# Altium PCB BLE_tag_NRF.PcbDoc
Units mm, origin at the board's own origin, x right, y up, seen from the top; angles counter-clockwise.
Board outline 48 x 58 mm, 2 copper layers (Top Layer, Bottom Layer); 34 components, 24 nets, 113 pads, 161 vias.
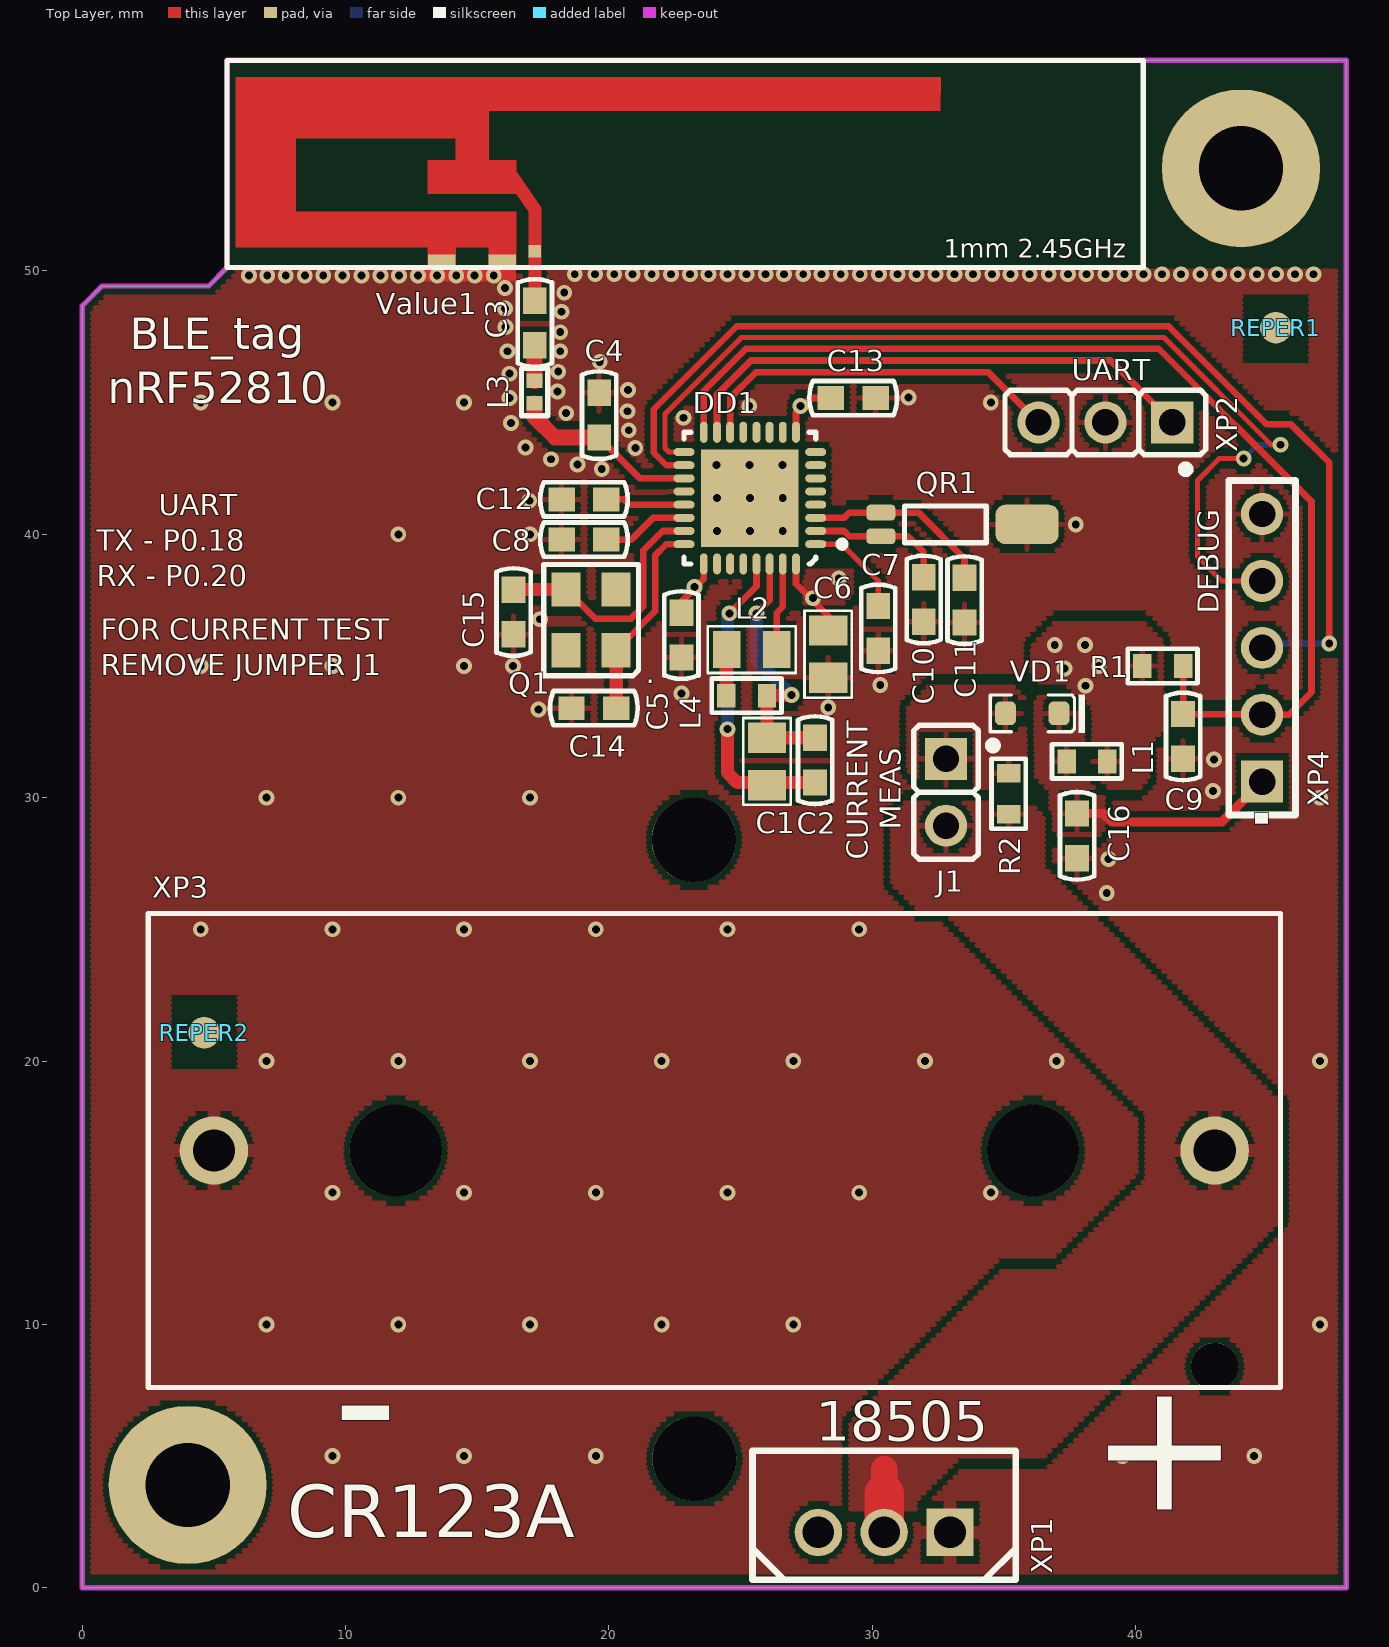
[diagram p0: Top Layer view]
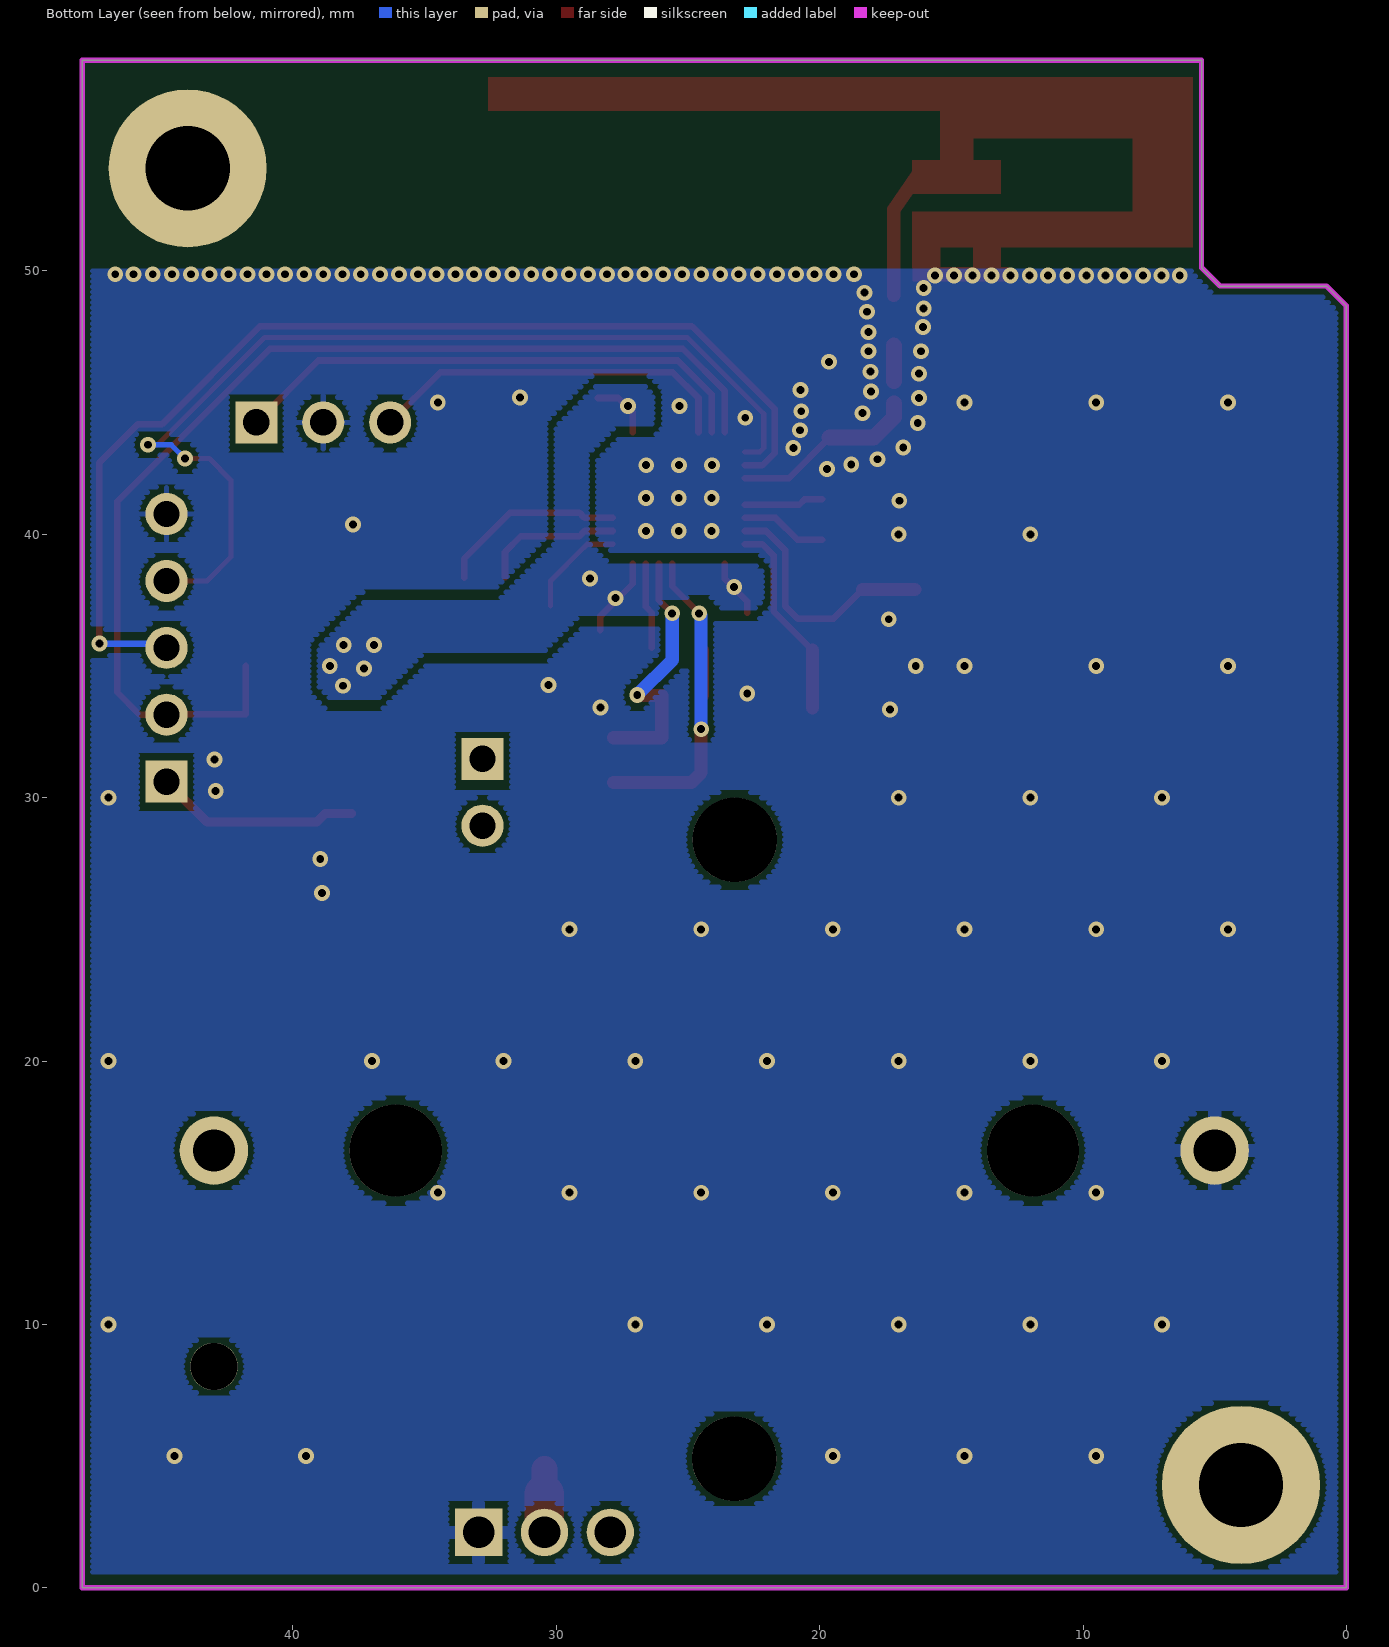
[diagram p1: Bottom Layer view, seen from below]
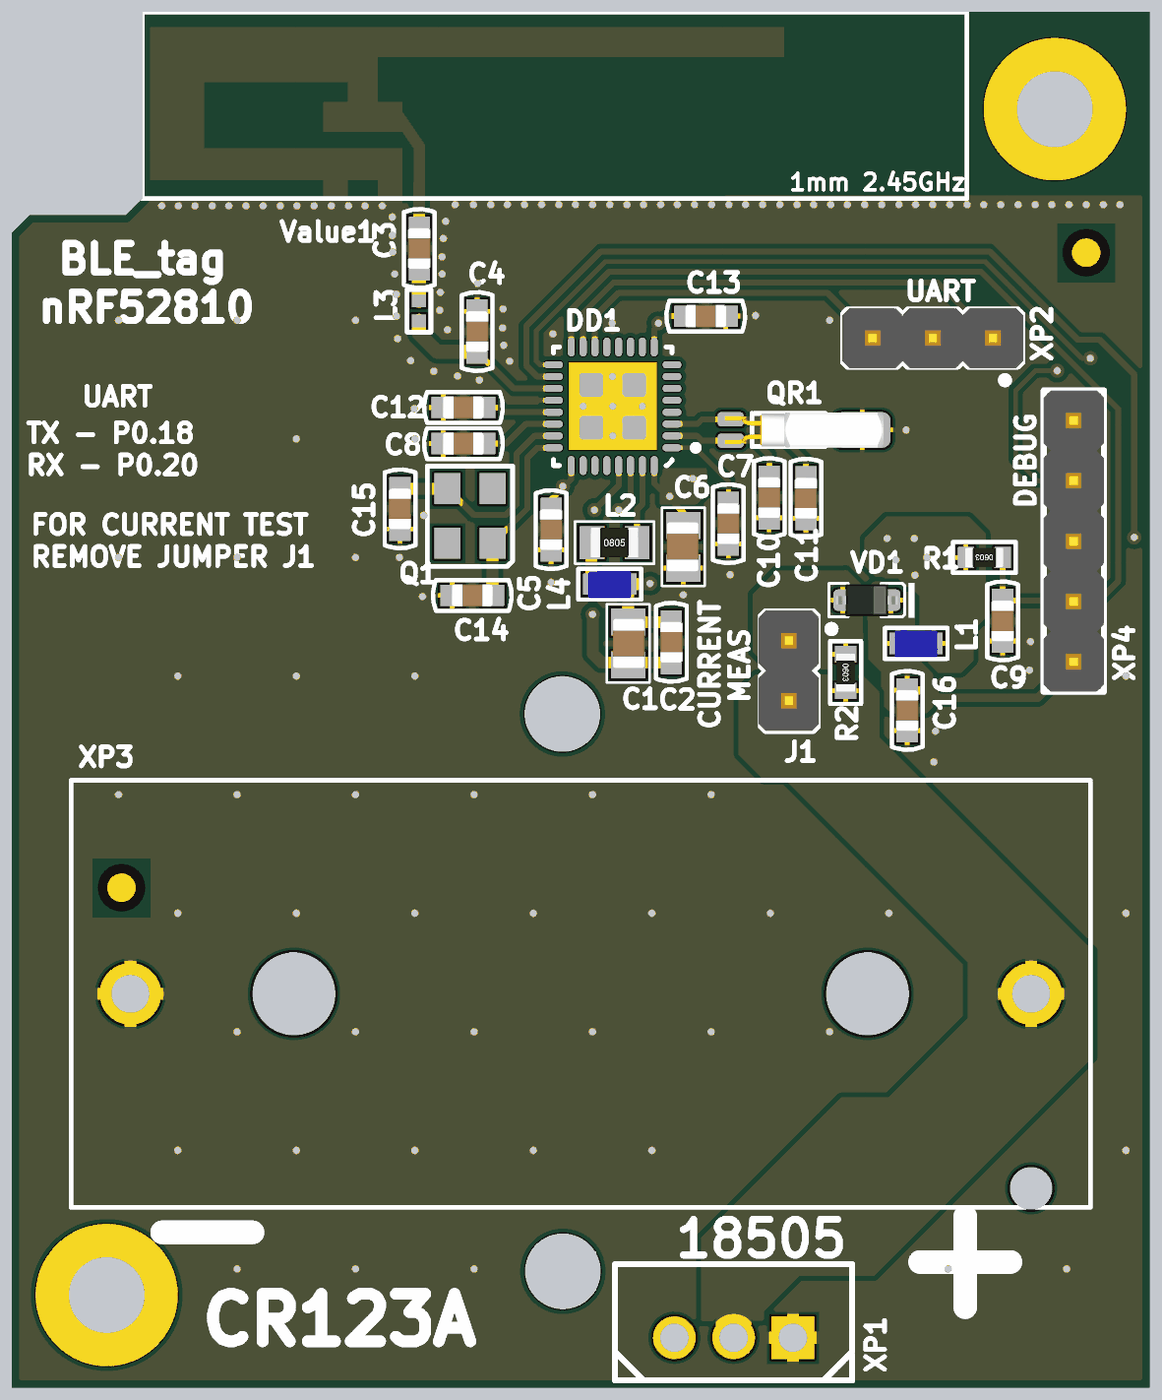
[diagram p2: 3D render of the assembled board from above, using the file's embedded part models]

## Layer stack, top to bottom
Top Solder: solder mask 0.0102, Solder Resist, Dk 3.5
Top Layer: signal copper 0.0356
Dielectric 1: dielectric 0.32, FR-4, Dk 4.8
Bottom Layer: signal copper 0.0356
Bottom Solder: solder mask 0.0102, Solder Resist, Dk 3.5

## Board outline
0,0 0,48.675 0.75,49.425 4.8,49.425 5.5,50.125 5.5,58 48,58 48,0

## Design rules (kind name [scope] priority, off if disabled: settings)
Clearance [All] p1: gap=0.2 ignorepadtopadclearanceinfootprint=FALSE
ComponentClearance [All] p1: gap=0.05 collisioncheckmode=3 verticalgap=2540 showdistances=FALSE
HoleSize [All] p1: absolutevalues=TRUE maxlimit=10 minlimit=0.025 maxpercent=80.000 minpercent=20.000
HoleToHoleClearance [All] p1: gap=0.05 allowstackedmicrovias=TRUE
MinimumSolderMaskSliver [All] p1: minsoldermaskwidth=0.05
PolygonConnect PolygonConnect_1 [InComponent('XP3') OR InComponent('XP1')] p1: connectstyle=Relief reliefconductorwidth=0.5 reliefentries=4 polygonreliefangle="90 Angle" airgapwidth=0.2
PolygonConnect VIA [IsVia] p2: connectstyle=Direct reliefconductorwidth=0.254 reliefentries=4 polygonreliefangle="90 Angle" airgapwidth=0.254
PolygonConnect [All] p3: connectstyle=Relief reliefconductorwidth=0.2 reliefentries=4 polygonreliefangle="90 Angle" airgapwidth=0.2
RoutingVias [All] p1: holewidth=0.4 width=0.8 viastyle="Through Hole" minholewidth=0.3 minwidth=0.6 maxholewidth=0.5 maxwidth=1
ShortCircuit Antenna [InComponent('ANT1')] p1: allowed=TRUE
ShortCircuit [All] p2: allowed=FALSE
SilkToSilkClearance [All] p1: silktosilkclearance=0.05
SilkToSolderMaskClearance [IsPad] p1: minsilkscreentomaskgap=0.05 clearancetoexposedcopper=TRUE
SolderMaskExpansion [All] p1: expansion=0.102
Width [All] p1: maxlimit=3 minlimit=0.2 preferedwidth=0.5
23 further rules are at their usual default settings.

## Classes and differential pairs
component class [4]-CONNECTORS: C16 J1 R2 VD1 XP1 XP2 XP3 XP4
component class [3]-MCU: C1 C2 C3 C4 C5 C6 C7 C8 C9 C10 C11 C12 C13 C14 C15 DD1 L1 L2 L3 L4 Q1 QR1 R1 REPER1 REPER2 Value1

## Components (designator, comment, footprint, x,y, rotation, side; value= is the part's Value field where it differs from the comment)
C1 "n.p" CC0805 26,31.375 r270 top
C2 "1uF" CC0603 27.825,31.425 r270 top
C3 "12pF" CC0603 17.186,48.025 r90 top
C4 "0.9pF" CC0603 19.625,44.525 r270 top
C5 "0.1uF" CC0603 22.75,36.175 r270 top
C6 "4.7uF" CC0805 28.325,35.45 r90 top
C7 "0.1uF" CC0603 30.225,36.425 r90 top
C8 "100pF" CC0603 19.05,39.8 r0 top
C9 "200pF" CC0603 41.8,32.325 r90 top
C10 "12pF" CC0603 31.95,37.525 r270 top
C11 "12pF" CC0603 33.5,37.5 r270 top
C12 "n.p" CC0603 19.05,41.325 r0 top
C13 "0.1uF" CC0603 29.275,45.175 r180 top
C14 "12pF" CC0603 19.425,33.4 r180 top
C15 "12pF" CC0603 16.375,37.05 r270 top
C16 "0.1uF" CC0603 37.775,28.55 r90 top
DD1 "nRF52810QCAA" QFN-32 27.85,39.625 r180 top
J1 "PLS-02" PLS-02 32.775,31.475 r270 top
L1 "BLM18HE152SN1" L0603 38.15,31.375 r0 top
L2 "10uH" RC0805 25.425,35.625 r0 top
L3 "3.9nH" L0402 17.175,45.4 r90 top
L4 "L0603" L0603 25.225,33.875 r0 top value=15nH
Q1 "SJK-7U" QUARTZ_3225_4 18.375,35.6 r90 top
QR1 "MS3V-T1R" MS3V-T1R 30.325,40.825 r0 top
R1 "100k" RC0603 41.025,35 r180 top
R2 "n.p" RC0603 35.175,30.15 r270 top
REPER1 "REPER1.2" REPER1.2 45.325,47.85 r90 top
REPER2 "REPER1.2" REPER1.2 4.625,21.075 r90 top
Value1 "ANTENNA_IFA_245_1MM" IFA245_1mm 13.092,44.294 r0 top value="IFA 2.45GHz" (schematic designator =Value1)
VD1 "PMEG1020EJ" SOD323 36.075,33.2 r0 top
XP1 "MW03D" MW03D 32.95,2.1 r180 top
XP2 "PLS03" PLS-03 41.39,44.25 r180 top
XP3 "BHC-CR123A" CR123_HOLDER 43,16.6 r180 top
XP4 "PLS-05" PLS-05 44.8,30.61 r90 top

## Footprints (in the part's own frame and the unit in brackets; to place one, negate y for a bottom-side part, rotate by r counter-clockwise, add the part's x,y. Pads: shape width x height; smd on the part's side, far side on the other; paste and mask are expansions set on the pad)
CC0603 [mm]
  rect 1x0.9 smd paste-25.4: 1(-0.85,0) 2(0.85,0)
  silkscreen extent -1.66,-0.65 1.66,0.65, body extent -0.87,-0.47 0.88,0.48, height 0.85
CC0805 [mm]
  rect 1.15x1.45 smd paste-25.4: 1(-0.9,0) 2(0.9,0)
  silkscreen extent -1.65,-0.9 1.65,0.9, body extent -1.05,-0.65 1.05,0.7, height 1.1
CR123_HOLDER [mm]
  round 1.8 hole 1.8 unplated: 0(0,8.2)
  round 3.5 hole 3.5 unplated: 0(6.9,0) 0(31.1,0)
  round 2.6 hole 1.6: 1(0,0) 2(38,0)
  silkscreen extent -2.5,-9 40.5,9, body extent -2.5,-9 40.5,9, height 14
IFA245_1mm [mm]
  rect 0.48x0.48 smd paste-2: 1(4.094,6.459)
  rect 1.046x0.5 smd paste-2: 2(0.558,6.081) 2(2.86,6.081)
  Top Layer region: 19.497,13.06 19.496,13.061 -7.268,13.061 -7.268,6.606 0.035,6.606 0.035,5.831 1.081,5.831 1.081,6.605 2.337,6.605 2.337,5.831 3.383,5.831 3.383,7.955 3.382,7.956 -4.987,7.956 -4.987,10.748 -4.986,10.749 1.082,10.749 1.081,10.748 1.081,9.912 0.035,9.912 0.035,8.647 3.38,8.647 3.382,8.645 3.854,7.956 3.854,6.22 4.335,6.219 4.335,8.104 3.383,9.502 3.383,9.911 2.338,9.912 2.336,9.912 2.337,11.097 2.337,11.795 19.496,11.796
  silkscreen extent -7.6,5.83 27.2,13.7
L0402 [mm]
  rect 0.55x0.6 smd: 1(-0.425,0) 2(0.425,0)
  silkscreen extent -0.9,-0.5 0.9,0.5
L0603 [mm]
  rect 0.7x0.9 smd paste-25.4: 1(-0.775,0) 2(0.774,0)
  silkscreen extent -1.32,-0.65 1.33,0.65, body extent -0.9,-0.58 0.9,0.54, height 1
MS3V-T1R [mm]
  rrect50% 1.1x0.6 smd: 1(0,0) 2(0,-0.9)
  rrect50% 2.4x1.5 smd: 3(5.55,-0.45)
  silkscreen extent 0.9,-1.15 4,0.25, body extent -0.25,-1.19 6.45,0.29, height 1.48
MW03D [mm]
  rect 1.8x1.8 hole 1.2: 1(0,0)
  round 1.8 hole 1.2: 2(2.5,0) 3(5,0)
  silkscreen extent -2.5,-3.1 7.5,1.8
PLS-02 [mm]
  rect 1.6x1.6 hole 1: 1(0,0.025)
  round 1.6 hole 1: 2(2.54,0.025)
  silkscreen extent -1.27,-1.2 3.81,1.95, body extent -1.29,-1.26 3.79,1.28, height 10.1
PLS-03 [mm]
  rect 1.6x1.6 hole 1: 1(0,0)
  round 1.6 hole 1: 2(2.54,0) 3(5.08,0)
  silkscreen extent -1.27,-1.23 6.35,1.93, body extent -1.27,-1.27 6.35,1.27, height 10.1
PLS-05 [mm]
  rect 1.6x1.6 hole 1: 1(0,0)
  round 1.6 hole 1: 2(2.54,0) 3(5.08,0) 4(7.62,0) 5(10.16,0)
  silkscreen extent -1.27,-1.27 11.43,1.27, body extent -1.27,-1.27 11.43,1.27, height 10.1
QFN-32 [mm]
  oval 0.8x0.3 smd mask+0.05: 1(0,0) 2(0,-0.5) 3(0,-1) 4(0,-1.5) 5(0,-2) 6(0,-2.5) 7(0,-3) 8(0,-3.5) 17(5,-3.5) 18(5,-3) 19(5,-2.5) 20(5,-2) 21(5,-1.5) 22(5,-1) 23(5,-0.5) 24(5,0)
  oval 0.3x0.8 smd mask+0.05: 9(0.75,-4.25) 10(1.25,-4.25) 11(1.75,-4.25) 12(2.25,-4.25) 13(2.75,-4.25) 14(3.25,-4.25) 15(3.75,-4.25) 16(4.25,-4.25) 25(4.25,0.75) 26(3.75,0.75) 27(3.25,0.75) 28(2.75,0.75) 29(2.25,0.75) 30(1.75,0.75) 31(1.25,0.75) 32(0.75,0.75)
  rect 3.7x3.7 smd paste-10 mask+0.05: 33(2.5,-1.75)
  silkscreen extent -1.13,-4.25 5,0.75
QUARTZ_3225_4 [mm]
  rect 1.3x1.1 smd: 1(0,-1.9) 2(2.3,-1.9) 3(2.3,0) 4(0,0)
  silkscreen extent -0.97,-2.75 3.25,0.85
RC0603 [mm]
  rect 0.7x0.9 smd paste-25.4: 1(-0.775,0) 2(0.774,0)
  silkscreen extent -1.32,-0.65 1.33,0.65, body extent -0.8,-0.4 0.8,0.4, height 0.45
RC0805 [mm]
  rect 1.05x1.4 smd paste-25.4: 1(-0.95,0) 2(0.95,0)
  silkscreen extent -1.67,-0.89 1.67,0.89, body extent -1,-0.62 1,0.63, height 0.6
REPER1.2 [mm]
  round 1.2 smd paste-25.4 mask+0.05: 1(0,0)
  Top Layer pour cut-out: -1.35,-1.325 1.325,-1.325 1.325,1.325 -1.35,1.325
SOD323 [mm]
  rrect50% 0.8x0.9 smd: 1(-1.016,0) 2(1.016,0)
  silkscreen extent -1.6,-0.74 2,0.72, body extent -1.3,-0.67 1.3,0.67, height 1.1

## Part data
C1 C6: library part CC0805, "CC0805"
C2 C3 C4 C5 C7 C8 C9 C10 C11 C12 C13 C14 C15 C16: library part CC0603, "CC0603"
DD1: library part NRF52810QCAA, "BLE 5 controller"
L1: library part L0603, "L0603"
L2: library part L0805, "L0805"
L3: library part L0402, "L0402"
Q1: "3.2x2.5mm 4 pin SMD quartz crystal"
QR1: "CRYSTAL_32768 Hz"
R1 R2: library part RC0603, "RC0603"
Value1: "Antenna 2.45GHz"
VD1: library part PMEG2010
XP3: "Holder for CR123 battery"

## Free pads (board coordinates)
  round 6 hole 3.2 unplated mask+0.05: 0(4,3.9) 0(44,53.9)
  round 3.2 hole 3.2 unplated mask+0.05: 0(23.225,28.4) 0(23.246,4.9)

## Via types
v1: diameter 0.6, hole 0.3, Top Layer to Bottom Layer, tented both sides, 161 vias

## Nets (pads, with @x,y where several pads share a name; then routed paths per layer and width w, separated by ;. In a path a pad name is that pad's centre, name@x,y a point inside that pad or via, vN(x,y) a via of type N, cw(c..) or ccw(c..) an arc to the next point about the centre after c; other vN are vias at no path point)
+3V: C16.2 L1.1 VD1.2 XP4.1 | length 7.8
  Top Layer w0.35: C16.2 38.776,29.4 39.101,29.075 43.265,29.075 XP4.1
+3V_F: C5.1 C6.2 C13.2 DD1.9 DD1.25 DD1.32 L1.2 R1.2 | length 7.5
  Top Layer w0.25: C5.1 22.75,37.45 23.6,38.3 DD1.25 ; DD1.32 27.1,38.125 28.325,36.9 C6.2 ; DD1.9 27.1,44.625 27.65,45.175 C13.2
  other v1: 38.1,34.25 37.3,34.9 38.6,35 36.925,35.8 38.075,35.8 27.75,37.575 23.246,38 28.725,38.325 27.275,44.875
GND: C4.1 C5.2 C6.1 C7.1 C8.1 C9.1 C10.2 C11.2 C12.1 C13.1 C14.2 C15.2 C16.1 DD1.20 DD1.33 QR1.3 Value1.2 XP1.1 XP2.2 XP3.2 XP4.5
  other v1: 9.5,5 14.5,5 19.5,5 39.5,5 44.5,5 7,10 12,10 17,10 22,10 27,10 47,10 9.5,15 14.5,15 19.5,15 24.5,15 29.5,15 34.5,15 7,20 12,20 17,20 22,20 27,20 32,20 37,20 47,20 4.5,25 9.5,25 14.5,25 19.5,25 24.5,25 29.5,25 38.9,26.375 38.966,27.675 7,30 12,30 17,30 47,30 42.934,30.25 42.975,31.45 17.325,33.35 28.325,33.425 22.749,33.95 30.3,34.275 4.5,35 9.5,35 14.5,35 16.35,35 17.375,36.775 12,40 17,40 24.1,40.125 25.35,40.125 26.6,40.125 37.725,40.375 16.975,41.275 24.1,41.375 25.35,41.375 26.6,41.375 19.725,42.475 24.088,42.625 25.338,42.625 26.588,42.625 18.8,42.65 17.8,42.85 21,43.275 16.825,43.3 20.75,43.95 16.275,44.225 22.825,44.425 18.374,44.6 20.7,44.675 25.325,44.875 4.5,45 9.5,45 14.5,45 34.5,45 16.225,45.175 31.375,45.2 18.05,45.425 20.725,45.476 16.225,46.1 18.075,46.175 19.65,46.55 16.15,46.95 18.15,46.95 18.15,47.675 16.075,47.875 18.2,48.45 16.05,48.575 18.3,49.175 16.05,49.35 6.325,49.825 7.025,49.825 7.725,49.825 8.45,49.825 9.15,49.825 9.875,49.825 10.6,49.825 11.325,49.825 12.025,49.825 12.75,49.825 13.475,49.825 14.2,49.825 14.9,49.825 15.625,49.825 18.7,49.875 19.475,49.875 20.2,49.875 20.9,49.875 21.625,49.875 22.35,49.875 23.075,49.875 23.775,49.875 24.5,49.875 25.225,49.875 25.95,49.875 26.65,49.875 27.375,49.875 28.075,49.875 28.8,49.875 29.525,49.875 30.25,49.875 30.95,49.875 31.675,49.875 32.4,49.875 33.125,49.875 33.825,49.875 34.55,49.875 35.25,49.875 35.975,49.875 36.7,49.875 37.425,49.875 38.125,49.875 38.85,49.875 39.575,49.875 40.3,49.875 41,49.875 41.725,49.875 42.45,49.875 43.175,49.875 43.875,49.875 44.6,49.875 45.325,49.875 46.05,49.875 46.75,49.875
NetC1_1: C1.1 C2.1 DD1.30 L4.2 | length 10.1
  Top Layer w0.25: v1(25.6,37) 26.1,37.5 DD1.30
  Top Layer w0.5: C1.1 C2.1 ; C1.1@25.999,32.276 L4.2 26.9,33.875 v1(26.925,33.9)
  Bottom Layer w0.5: v1(25.6,37) 25.6,35.225 v1(26.925,33.9)
NetC1_2: C1.2 C2.2 DD1.29 | length 14
  Top Layer w0.25: v1(24.575,37) 25.6,38.025 DD1.29
  Top Layer w0.5: v1(24.5,32.6) 24.5,30.95 24.875,30.575 C2.2
  Bottom Layer w0.25: 24.575,34.875 v1(24.575,37)
  Bottom Layer w0.5: v1(24.5,32.6) 24.5,36.925 v1(24.575,37)
NetC3_1: C3.1 L3.2 | length 1.4
  Top Layer w0.6: L3.2 17.175,47.164 C3.1
NetC3_2: C3.2 Value1.1 | length 1.7
  Top Layer w0.5: C3.2@17.186,49.064 Value1.1
NetC4_2: C4.2 DD1.19 L3.1 | length 7.2
  Top Layer w0.25: C4.2 21.175,42.125 DD1.19
  Top Layer w0.6: L3.1 17.175,44.45 17.95,43.675 C4.2
NetC7_2: C7.2 DD1.1 | length 3.9
  Top Layer w0.2: DD1.1@27.851,39.626 28.823,39.626 28.949,39.5 28.958,39.5 30.225,38.233 C7.2
NetC8_2: C8.2 DD1.22 | length 3.3
  Top Layer w0.25: C8.2 20.85,39.8 21.675,40.625 DD1.22
NetC9_2: C9.2 DD1.16 R1.1 XP4.2 | length 42
  Top Layer w0.25: DD1.16 23.6,45.448 25.202,47.05 40.875,47.05 46.675,41.25 46.675,34 45.825,33.15 XP4.2 44.775,33.175 C9.2 R1.1
NetC10_1: C10.1 DD1.2 QR1.2 | length 5.4
  Top Layer w0.25: DD1.2 28.925,40.125 29.125,39.925 QR1.2 31.35,39.925 31.95,39.325 C10.1
NetC11_1: C11.1 DD1.3 QR1.1 | length 7.2
  Top Layer w0.25: DD1.3 28.925,40.625 29.125,40.825 QR1.1 31.75,40.825 33.5,39.075 C11.1
NetC12_2: C12.2 DD1.21 | length 3
  Top Layer w0.25: C12.2 20.575,41.325 20.775,41.125 DD1.21
NetC14_1: C14.1 DD1.24 Q1.1 | length 7.7
  Top Layer w0.25: Q1.1 21.75,37.075 21.75,39.2 22.175,39.625 DD1.24
  Top Layer w0.5: C14.1 Q1.1
NetC15_1: C15.1 DD1.23 Q1.3 | length 9.6
  Top Layer w0.25: Q1.3 19.475,36.8 20.839,36.8 21.3,37.261 21.3,39.386 22.039,40.125 DD1.23
  Top Layer w0.5: C15.1 Q1.3
NetDD1_14: DD1.14 XP2.3 | length 14.2
  Top Layer w0.25: DD1.14 24.6,45.175 25.575,46.15 34.41,46.15 XP2.3
NetDD1_15: DD1.15 XP2.1 | length 20.2
  Top Layer w0.25: DD1.15 24.1,45.311 25.389,46.6 39.04,46.6 XP2.1
NetDD1_17: DD1.17 XP4.4 | length 37.8
  Top Layer w0.2: DD1.17 22.275,43.125 22.125,43.275 22.125,44.574 25.026,47.475 41.075,47.475 45.15,43.4 v1(45.5,43.4) ; v1(44.1,42.875) 43.175,42.875 42.35,42.05 42.35,39.15 43.27,38.23 XP4.4
  Bottom Layer w0.2: v1(44.1,42.875) 44.625,43.4 v1(45.5,43.4)
NetDD1_18: DD1.18 XP4.3 | length 41.6
  Top Layer w0.25: DD1.18 22.174,42.625 21.7,43.099 21.7,44.75 24.85,47.9 41.251,47.9 44.976,44.175 45.9,44.175 47.35,42.725 v1(47.35,35.85)
  Bottom Layer w0.25: XP4.3 44.96,35.85 v1(47.35,35.85)
NetDD1_31: DD1.31 L2.2 | length 3.3
  Top Layer w0.25: L2.2@26.375,35.7 26.375,37.025 26.6,37.25 DD1.31
NetJ1_1: J1.1 R2.1 VD1.1
NetJ1_2: J1.2 R2.2 XP1.2 XP3.1 | length 2.4
  Top Layer w1: 30.45,3.575 30.45,4.5
  Top Layer w1.5: XP1.2 30.45,3.575
NetL2_1: L2.1 L4.1 | length 1.8
  Top Layer w0.5: L4.1 24.45,35.6 L2.1
pads on no net: DD1.4 DD1.5 DD1.6 DD1.7 DD1.8 DD1.10 DD1.11 DD1.12 DD1.13 DD1.26 DD1.27 DD1.28 Q1.2 Q1.4 REPER1.1 REPER2.1 XP1.3 XP3.0

## Polygon pours and split planes (outlines as drawn)
GND on Top Layer "GND_L01_P028" (hatched Horizontal grid 0.2 track 0.2, remove dead copper, pour order 28): 0,58 48,58 48,0 0,0
+3V_F on Top Layer "+3V_F_L01_P018" (hatched Horizontal grid 0.2 track 0.2, remove dead copper, pour order 18): 29.225,38.675 27.425,38.675 27.425,37.325 28.825,37.325 29.225,37.725
+3V_F on Top Layer "+3V_F_L01_P024" (hatched Horizontal grid 0.2 track 0.2, remove dead copper, pour order 24): 38.225,33.425 37.425,34.225 36.525,34.225 36.075,34.675 36.075,35.775 36.925,36.625 40.325,36.625 41,35.95 41,32.525 40.475,32 40.475,30.7 40,30.225 38.875,30.225 38.225,30.875
+3V on Top Layer "+3V_L01_P021" (hatched Horizontal grid 0.2 track 0.2, remove dead copper, pour order 21): 36.2,32.4 36.2,33.687 36.4,33.887 37.363,33.887 38,33.25 38,30.8 38.776,30.024 38.776,28.751 38.55,28.525 37.125,28.525 36.775,28.875 36.775,30.225 36.225,30.775 36.225,31.35
NetJ1_1 on Top Layer "NETJ1_1_L01_P022" (hatched Horizontal grid 0.2 track 0.2, remove dead copper, pour order 22): 36.1,33.45 35.175,34.375 35.15,34.35 32.275,34.35 31.35,33.425 31.35,31.05 32.1,30.3 35.975,30.3 36.1,30.425
NetJ1_2 on Top Layer "NETJ1_2_L01_P020" (hatched Horizontal grid 0.2 track 0.2, remove dead copper, pour order 20): 29.175,2.887 29.175,6.275 35.05,12.15 37.025,12.15 40.425,15.55 40.425,17.95 32.65,25.725 31.75,25.725 30.75,26.725 30.75,29.3 31.425,29.975 35.8,29.975 36.5,29.275 36.5,27.4 45.5,18.4 45.5,13.95 36.35,4.8 33.175,4.8 31.625,3.25 31.625,2.912
GND on Bottom Layer "GND_L02_P026" (hatched Horizontal grid 0.2 track 0.2, remove dead copper, pour order 26): 0,58 48,58 48,0 0,0
+3V_F on Bottom Layer "+3V_F_L02_P019" (hatched Horizontal grid 0.2 track 0.2, remove dead copper, pour order 19): 28,38.9 28.825,39.725 28.825,43 27.8,44.025 26.55,44.025 26.325,44.25 26.325,45.3 26.675,45.65 28.45,45.65 30,44.1 30,39.7 32.3,37.4 37.325,37.4 39,35.725 39,34.175 38.55,33.725 36.8,33.725 35.05,35.475 30.55,35.475 29.175,36.85 25.8,36.85 25,37.65 24.175,37.65 23.6,37.075 22.575,37.075 22.175,37.475 22.175,38.575 22.5,38.9

## Keep-outs
Keep-Out Layer:
  the board outline again, w0.2

## Other copper
Top Layer:
  rectangle net GND: 12.821,49.6 16.475,50.15
  pour cut-out: 5.5,50.125 5.5,58 48,58 48,50.175
  pour cut-out: 14.173,50.899 15.429,50.899 15.429,50.125 14.173,50.125
  pour cut-out: 5.5,50.9 5.5,50.125 13.127,50.125 13.127,50.9
Bottom Layer:
  pour cut-out: 5.5,50.125 5.5,58 48,58 48,50.175

## Silkscreen, mask and mechanical layers (free items; w line width, h text height)
Top Overlay:
  text "BLE_tag" at 1.8,47.025 h1.2
  text "UART" at 37.58,45.85 h0.8
  text "nRF52810" at 0.975,44.975 h1.2
  text "UART" at 2.9,40.725 h0.8
  text "TX - P0.18" at 0.55,39.375 h0.8
  text "RX - P0.20" at 0.55,38.025 h0.8
  text "DEBUG" at 43.15,36.975 h0.8 r90
  text "FOR CURRENT TEST" at 0.7,36 h0.8
  text "REMOVE JUMPER J1" at 0.7,34.65 h0.8
  text "." at 21.4,34.35 h0.8
  text "MEAS" at 31.075,28.775 h0.8 r90
  text "." at 46,28.575 h5 r90
  text "CURRENT" at 29.825,27.65 h0.8 r90
  text "18505" at 27.85,5.575 h1.5
  text "CR123A" at 7.775,1.925 h2

## Text inside footprints (layer, text, board x,y; h text height)
Value1: Top Overlay "1mm 2.45GHz" at 32.717,50.494 h0.7
XP3: Top Overlay "-" at 12,8.5 h5 r180; Top Overlay "+" at 43.975,7.25 h5 r180